# Altium PCB linkit-v4-0.1_6layers.PcbDoc (part 3 of 4)
Units mm, origin at the board's own origin, x right, y up, seen from the top; angles counter-clockwise.
Board outline 70 x 35 mm, 6 copper layers (Top Layer, Int1 (GND), Int2 (Sign), Int3 (Sign), Int4 (PWR), Bottom Layer), stack 1.551 mm thick; 190 components, 157 nets, 771 pads, 177 vias.
Unrouted connection lines stored in the file: 245.
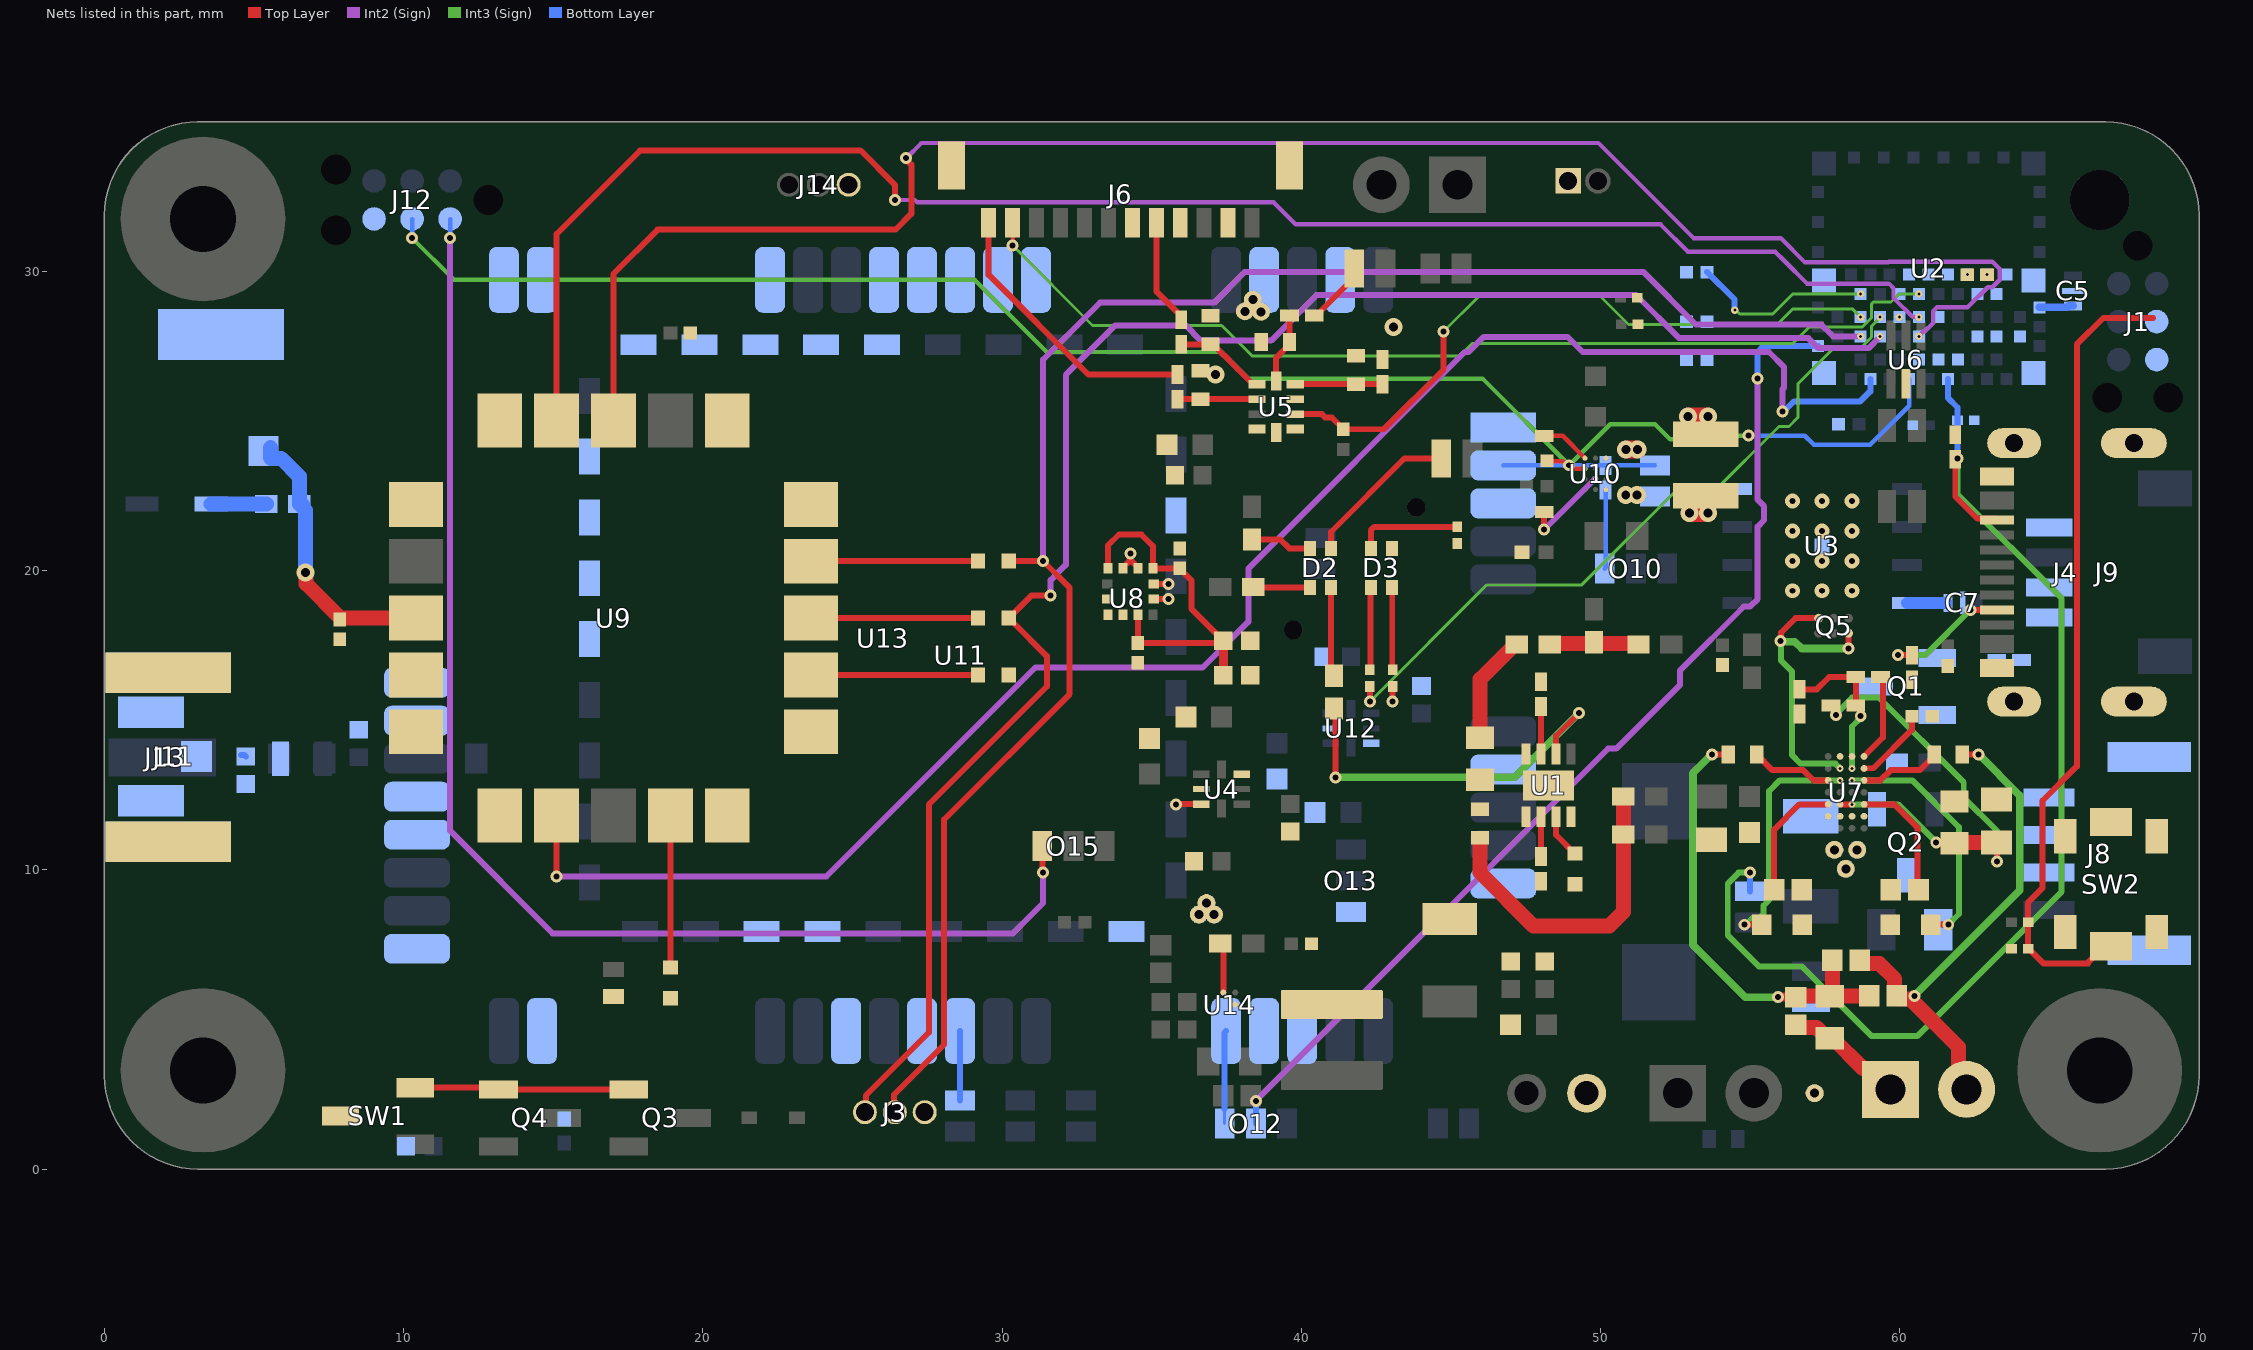
[diagram p6: the nets of this part, all layers, seen from the top]

## Part data (continued)
R46 R49: "Thick Film Resistors - SMD 0 Ohms 50mW 0201 1%", Manufacturer_Name=KEMET, Mouser Part Number=603-RC0201FR-070RL, Arrow Part Number=RC0201FR-070RL, Arrow Price/Stock=https://www.arrow.com/en/products/rc0201fr-070rl/yageo?region=nac, Datasheet Link=http://www.yageo.com/documents/recent/PYu-RC0201_51_RoHS_L_8.pdf, Height=0.26mm, Manufacturer_Part_Number=RC0201FR-070RL, Mouser Price/Stock=https://www.mouser.co.uk/ProductDetail/YAGEO/RC0201FR-070RL?qs=LWWr1WFOkdETHfAClQk8Xg%3D%3D
R47: "Thick Film Resistors - SMD 1/20W 2.74Kohms 1% 200ppm", Manufacturer_Name=Vishay, Datasheet Link=http://www.vishay.com/docs/20035/dcrcwe3.pdf, Height=0.28mm, Manufacturer_Part_Number=CRCW02012K74FNED
R48: "Thick Film Resistors - SMD 1/20watt 100Kohms 5% 200ppm", Manufacturer_Name=Vishay, Mouser Part Number=71-CRCW0201100KJNED, Arrow Part Number=CRCW0201100KJNED, Arrow Price/Stock=https://www.arrow.com/en/products/crcw0201100kjned/vishay, Datasheet Link=http://www.vishay.com/docs/20035/dcrcwe3.pdf, Height=0.28mm, Manufacturer_Part_Number=CRCW0201100KJNED, Mouser Price/Stock=https://www.mouser.co.uk/ProductDetail/Vishay-Dale/CRCW0201100KJNED?qs=IQLUlsvFoXu8A8gHIw6owA%3D%3D
R50: "Thick Film Resistors - SMD 1/16watt 49.9Kohms 1%", Manufacturer_Name=Vishay, Mouser Part Number=71-CRCW0402-49.9K-E3, Arrow Part Number=CRCW040249K9FKED, Arrow Price/Stock=https://www.arrow.com/en/products/crcw040249k9fked/vishay?region=nac, Datasheet Link=http://www.vishay.com/docs/20035/dcrcwe3.pdf, Height=0.4mm, Manufacturer_Part_Number=CRCW040249K9FKED, Mouser Price/Stock=https://www.mouser.co.uk/ProductDetail/Vishay-Dale/CRCW040249K9FKED?qs=hAuyw6LW%252BLhwjtjsHx%2FGDQ%3D%3D
R52 R53 R54 R55 R56: "Thick Film Resistors - SMD CRCW 402 jumper", Manufacturer_Name=Vishay, Mouser Part Number=71-CRCW04020000Z0EEH, Arrow Part Number=CRCW04020000Z0EEHP, Arrow Price/Stock=https://www.arrow.com/en/products/crcw04020000z0eehp/vishay?utm_currency=USD&region=nac, Datasheet Link=http://www.vishay.com/docs/20035/dcrcwe3.pdf, Height=0.4mm, Manufacturer_Part_Number=CRCW04020000Z0EEHP, Mouser Price/Stock=https://www.mouser.co.uk/ProductDetail/Vishay-Dale/CRCW04020000Z0EEHP?qs=Imq1NPwxi74NTc567q7flQ%3D%3D
SW1: "Board Mount Hall Effect/Magnetic Sensors Integrated Digital Omnipolar, TMR, High Sensitivity Magnetic Switch, SOT23 Package, Ind Temp, 2Hz", Manufacturer_Name="Allegro MicroSystems", Mouser Part Number=462-CT8132BV-IS3, Datasheet Link=https://www.mouser.fr/datasheet/2/1115/Allegro_DS_CT813x_Datasheet_GS_FINAL_R2_v2-3441103.pdf, Height=1.4mm, Manufacturer_Part_Number=CT8132BV-IS3, Mouser Price/Stock=https://www.mouser.fr/ProductDetail/Allegro-MicroSystems/CT8132BV-IS3?qs=GBLSl2Akirsc7cUAudCqXg%3D%3D
SW2: "SW SPST PB 50MA 12V SMT CK variant", Manufacturer=C&K, Manufacturers Part Number="PTS820J2xM SMTR LFS", Supplier Part Number 1=611-PTS820J25MSMTR, Distributor 1=EBV, Distributor 2="Future Electronics", Supplier 1=Mouser, Supplier 2=Digi-Key, Supplier Part Number 2=CKN10505CT-ND
U1: "Battery Management 800-mA linear batter y charger for one-ce", Manufacturer_Name="Texas Instruments", Mouser Part Number=595-BQ25176MDSGR, Arrow Part Number=BQ25176MDSGR, Arrow Price/Stock=https://www.arrow.com/en/products/bq25176mdsgr/texas-instruments?region=nac, Datasheet Link=https://www.ti.com/lit/gpn/bq25176m, Height=0.8mm, Manufacturer_Part_Number=BQ25176MDSGR, Mouser Price/Stock=https://www.mouser.co.uk/ProductDetail/Texas-Instruments/BQ25176MDSGR?qs=Y0Uzf4wQF3nVhcdITj52nA%3D%3D
U2: "IC ISP Smart Bluetooth Module", Manufacturer=InsightSIP, Manufacturers Part Number=ISP1807-LR-ST, Temp Max=85, Temp Min=-40, Supplier 1=Rutronik, Supplier 2=Mouser, Supplier Part Number 1=ISP1807-LR-ST, Supplier Part Number 2=359-ISP1807-LR-ST, Supplier Unit Price 1=8.5
U3: "IC MEM SERIAL NOR FLASH QSPI 128Mb/16MB 3.6V 166MHz WSON8 6X5", Manufacturer=ISSI, Supplier Part Number 1=2901145, Temp Max=105, Temp Min=-40, Distributor 1=EBV, Distributor 2="Future Electronics", Manufacturers Part Number=IS25LP128F-JKLE, Supplier 1=Farnell, Supplier 2=Mouser, Supplier Part Number 2=870-IS25LP128FJKLETR
U4 U12: "Power Switch ICs - Power Distribution Low Input VTG Dual L oad Switch", Manufacturer_Name="Texas Instruments", Mouser Part Number=595-TPS22960RSER, Arrow Part Number=TPS22960RSER, Arrow Price/Stock=https://www.arrow.com/en/products/tps22960rser/texas-instruments?region=nac, Datasheet Link=https://www.ti.com/lit/ds/symlink/tps22960.pdf?ts=1638681846865&ref_url=https%253A%252F%252Fwww.google.com%252F, Height=0.6mm, Manufacturer_Part_Number=TPS22960RSER, Mouser Price/Stock=https://www.mouser.co.uk/ProductDetail/Texas-Instruments/TPS22960RSER?qs=EQxOuqCyzqQpKHLEcq5RSg%3D%3D
U5: "Analog to Digital Converters - ADC 16B ADC w/ Int MUX P GA Comp Osc & Ref A", Manufacturer_Name="Texas Instruments", Mouser Part Number=595-ADS1115IRUGR, Arrow Part Number=ADS1115IRUGR, Arrow Price/Stock=https://www.arrow.com/en/products/ads1115irugr/texas-instruments?utm_currency=USD&region=nac, Datasheet Link=https://www.ti.com/lit/ds/symlink/ads1115.pdf?ts=1601235703022&ref_url=https%253A%252F%252Fwww.ti.com%252Fproduct%252FADS1115%253FkeyMatch%253DADS1115IRUGR%2526tisearch%253DSearch-EN-everything%2526usecase%253DOPN, Height=0.4mm, Manufacturer_Part_Number=ADS1115IRUGR, Mouser Price/Stock=https://www.mouser.co.uk/ProductDetail/Texas-Instruments/ADS1115IRUGR?qs=IK5e5L0zOXhqw%2F8AHSSbuA%3D%3D
U6: "ESD Suppressors / TVS Diodes High Speed Interface Protection Low Cap", Manufacturer_Name=STMicroelectronics, Datasheet Link=https://datasheet.lcsc.com/szlcsc/STMicroelectronics-USBLC6-2P6_C15999.pdf, Height=0.6mm, Manufacturer_Part_Number=USBLC62P6
U7: "Wireless Charging ICs Wireless Pwr Receivr A 595-BQ51003YFPR", Manufacturer_Name="Texas Instruments", Mouser Part Number=595-BQ51003YFPT, Arrow Part Number=BQ51003YFPT, Arrow Price/Stock=https://www.arrow.com/en/products/bq51003yfpt/texas-instruments?region=nac, Datasheet Link=http://www.ti.com/lit/gpn/BQ51003, Height=0.5mm, Manufacturer_Part_Number=BQ51003YFPT, Mouser Price/Stock=https://www.mouser.co.uk/ProductDetail/Texas-Instruments/BQ51003YFPT?qs=QCUnHQQYO1rX6GZ4rUhwCg%3D%3D
U8: "IC AXL Accel/temp SPI/I2C 12LGA", Manufacturer="Bosch Sensortec", Supplier Part Number 1=828-1081-1-ND, Temp Max=85, Temp Min=-40, Manufacturers Part Number=BMA400, Supplier 1=Digi-Key, Supplier 2=Mouser, Supplier Part Number 2=262-BMA400
U9: "GNSS / GPS Modules u-blox M10 GNSS antenna module ROM, TCXO, SAW, LNA LGA, 16x16 mm", Manufacturer_Name=U-Blox, Mouser Part Number=377-SAM-M10Q-00B, Datasheet Link=https://content.u-blox.com/sites/default/files/documents/SAM-M10Q_DataSheet_UBX-22013293.pdf, Height=6.8mm, Manufacturer_Part_Number=SAM-M10Q-00B, Mouser Price/Stock=https://www.mouser.co.uk/ProductDetail/u-blox/SAM-M10Q-00B?qs=vvQtp7zwQdOaA6LplTUKjg%3D%3D
U10: "Switching Voltage Regulators 5.5-V buck-boost con verter with 75-nA op", Manufacturer_Name="Texas Instruments", Mouser Part Number=595-TPS63901YCJR, Arrow Part Number=TPS63901YCJR, Arrow Price/Stock=https://www.arrow.com/en/products/tps63901ycjr/texas-instruments?region=nac, Datasheet Link=https://www.ti.com/lit/ds/symlink/tps63901.pdf?ts=1658737279065&ref_url=https%253A%252F%252Fwww.ti.com%252Fproduct%252FTPS63901%253FkeyMatch%253DTPS63901YCJR%2526tisearch%253Dsearch-everything%2526usecase%253DOPN, Height=0.35mm, Manufacturer_Part_Number=TPS63901YCJR, Mouser Price/Stock=https://www.mouser.co.uk/ProductDetail/Texas-Instruments/TPS63901YCJR?qs=vvQtp7zwQdNZy3FE2e2hqg%3D%3D
U11: "KIM2 Module 48 pins 1.27mm pitch 36.6 x 25.4 x 5mm", Manufacturer=Kineis, Rating=3.3-5V, Tolerance="-30 /  +55°C", BOI="SMD48 36.6x25.4x5mm", DESIG="KIMFLEX Module 48 pins 1.27mm pitch 36.6 x 25.4 x 5mm", K P/N=-, Manufacturer P/N=KIM2, Supplier=Kineis, Supplier P/N=KIMFLEX, VAL=KIM2
U13: "Arribada SMD module Argos comunication with PA GR5504"
U14: "Switching Voltage Regulators 95-nA low IQ 5.5-V b oost converter with INLIMIT (1.9A)", Manufacturer_Name="Texas Instruments", Mouser Part Number=595-TPS612997YBHR, Arrow Part Number=TPS612997YBHR, Arrow Price/Stock=https://www.arrow.com/en/products/tps612997ybhr/texas-instruments?utm_currency=USD&region=nac, Datasheet Link=https://www.ti.com/lit/gpn/tps61299, Height=0.4mm, Manufacturer_Part_Number=TPS612997YBHR, Mouser Price/Stock=https://www.mouser.co.uk/ProductDetail/Texas-Instruments/TPS612997YBHR?qs=mELouGlnn3dLhnQxUdz5hw%3D%3D

## Via types
v1: diameter 0.6, hole 0.3, Top Layer to Int4 (PWR), 41 vias
v2: diameter 0.4, hole 0.2, Top Layer to Int3 (Sign), 33 vias
v3: diameter 0.4, hole 0.2, Int3 (Sign) to Bottom Layer, 15 vias
v4: diameter 0.4, hole 0.2, Int2 (Sign) to Bottom Layer, 14 vias
v5: diameter 0.25, hole 0.1, Int3 (Sign) to Bottom Layer, 12 vias
v6: diameter 0.25, hole 0.1, Int2 (Sign) to Bottom Layer, 12 vias
v7: diameter 0.5, hole 0.2, Top Layer to Bottom Layer, 12 vias
v8: diameter 0.6, hole 0.3, Int4 (PWR) to Bottom Layer, 10 vias
v9: diameter 0.4, hole 0.2, Top Layer to Int2 (Sign), 8 vias
v10: diameter 0.226, hole 0.1, Top Layer to Int3 (Sign), 5 vias
v11: diameter 0.2, hole 0.1, Top Layer to Bottom Layer, 4 vias
v12: diameter 0.6, hole 0.3, Top Layer to Bottom Layer, 4 vias
v13: diameter 0.4, hole 0.2, Top Layer to Bottom Layer, 2 vias
v14: diameter 0.4, hole 0.2, Int2 (Sign) to Int3 (Sign), 2 vias
v15: diameter 0.6, hole 0.3, Top Layer to Int3 (Sign), 2 vias
v16: diameter 0.169, hole 0.1, Top Layer to Int2 (Sign), 1 vias

## Nets (pads, with @x,y where several pads share a name; then routed paths per layer and width w, separated by ;. In a path a pad name is that pad's centre, name@x,y a point inside that pad or via, vN(x,y) a via of type N, cw(c..) or ccw(c..) an arc to the next point about the centre after c; other vN are vias at no path point)
ADC0: O7.2 R27.1
ADC1: O8.2 R30.1 | length 2.2
  Top Layer w0.2: R30.1@40.428,28.522 40.541,28.522 40.641,28.622 40.641,28.664 41.77,29.794 O8.2@41.77,30.099
ADC2: J6.5 R32.1 | length 3.6
  Top Layer w0.2: J6.5@35.154,31.623 35.154,29.332 35.987,28.499 R32.1@35.987,28.387
ADC3: J6.12 R51.1 | length 9.4
  Top Layer w0.2: J6.12@29.554,31.623 29.554,29.882 32.884,26.552 R51.1@35.864,26.552
ADC_ALERT_RDY: R28.2 U2.64 U5.2 | length 22.4
  Top Layer w0.2: U5.2@39.797,25.228 40.685,25.228 40.798,25.115 41.021,25.115 41.402,24.734 R28.2@41.402,24.724 42.758,24.724 44.751,26.717 v2(44.751,27.987)
  Int3 (Sign) w0.1: v2(44.751,27.987) 45.924,29.16 49.995,29.16 50.934,28.221 55.9,28.221 56.134,28.455 56.427,28.749 58.41,28.749 v5(58.685,28.474)
AGND: C14.2 C15.2 C16.2 C57.2 V?1.1 V?2.1 V?3.1 | length 0.6
  Top Layer w0.2: C57.2@36.626,26.678 36.687,26.617 37.071,26.617 v15(37.132,26.556)
  other v15: 43.076,28.133
BAT_AN: C4.2 O5.1 U2.38 | length 36.5
  Int3 (Sign) w0.2: v3(54.991,9.906) 54.61,9.906 54.248,9.544 54.248,7.816 55.288,6.776 56.724,6.776 59.055,4.445 60.579,4.445 65.405,9.271 65.405,19.071 61.924,22.552 v3(61.924,23.749)
  Bottom Layer w0.2: O5.1@54.991,9.284 v3(54.991,9.906) ; U2.38@61.61,26.399 61.61,25.766 61.924,25.452 C4.2@61.924,25.019 v3(61.924,23.749)
BAT_READ_EN: R3.2 R22.2 U2.9 | length 6.2
  Int3 (Sign) w0.1: v6(54.483,28.702) 54.524,28.702 54.651,28.575 55.753,28.575 56.427,29.249 v5(58.685,29.249)
  Bottom Layer w0.2: R22.2@53.553,29.972 53.563,29.972 54.473,29.062 54.473,28.712 v6(54.483,28.702)
BMA_PWR: C37.2 C38.2 R29.1 R31.2 U8.3 U8.7 U8.10 | length 12.2
  Top Layer w0.2: U8.10@33.54,20.079 33.54,20.843 33.906,21.209 34.654,21.209 35.04,20.823 U8.7@35.04,20.079 C37.2@35.941,20.079 35.941,20.059 36.322,19.678 36.322,18.727 R29.1@37.396,17.653 37.325,17.582 C38.2@34.537,17.582 34.54,17.586 U8.3@34.54,18.529
  Top Layer w0.3: R31.2@37.396,16.51 R29.1@37.396,17.653
BOOT1: C29.2 U7.C4 | length 4.2
  Top Layer w0.2: C29.2@55.798,9.328 55.798,11.348 56.642,12.192 U7.C4@57.601,12.192
BOOT2: C34.2 U7.C1 | length 4.2
  Top Layer w0.2: U7.C1@58.801,12.192 59.817,12.192 60.582,11.427 C34.2@60.582,9.328
CLAMP1: C23.2 U7.E3 | length 8.1
  Top Layer w0.2: v2(54.802,8.168) C23.2@55.388,8.168
  Int3 (Sign) w0.2: v2(54.802,8.168) 54.856,8.168 55.105,8.417 55.328,8.417 55.445,8.534 55.445,8.811 55.626,8.992 55.626,12.63 55.988,12.992 v10(58.001,12.992)
CLAMP2: C36.2 U7.E2 | length 8.2
  Top Layer w0.2: C36.2@61.029,8.168 v2(61.616,8.168)
  Int3 (Sign) w0.2: v10(58.401,12.992) 60.414,12.992 61.976,11.43 61.976,8.529 v2(61.616,8.168)
COIL-1: C24.1 C28.1 J7.1 | length 4.1
  Top Layer w0.5: C24.1@56.515,4.826 56.61,4.731 57.212,4.731 57.563,4.38 C28.1@57.658,4.38 57.753,4.38 58.766,3.367 58.99,3.367 J7.1@59.69,2.667
COIL-2: C32.1 C33.1 C34.1 C35.1 C36.1 J7.2 U7.B1 U7.B2 | length 17
  Top Layer w0.2: C35.1@62.09,13.862 v2(62.631,13.862)
  Top Layer w0.5: C32.1@58.661,6.987 58.661,6.972 58.756,6.877 59.312,6.877 59.825,6.364 59.825,5.866 C33.1@59.896,5.795 59.896,5.78 59.991,5.685 60.355,5.685 61.962,4.078 61.962,2.935 J7.2@62.23,2.667
  Int3 (Sign) w0.254: v2(60.482,5.795) 64.008,9.321 64.008,12.485 v2(62.631,13.862)
COMM1: C25.2 U7.E4 | length 2.7
  Top Layer w0.2: C25.2@55.212,13.862 55.739,13.335 56.769,13.335 57.112,12.992 U7.E4@57.601,12.992
COMM2: C35.2 U7.E1 | length 2.7
  Top Layer w0.2: U7.E1@58.801,12.992 59.347,12.992 59.69,13.335 60.663,13.335 C35.2@61.19,13.862
DCDC_3V3: D3.1 R29.2
GND: BT1.- C1.2 C2.1 C3.1 C4.1 C5.3 C6.1 C7.3 C8.2 C9.1 C10.2 C11.1 C12.1 C13.2 C17.1 C18.1 C19.1 C20.2 C21.2 C22.2 C26.2 C27.2 C30.2 C31.2 C37.1 C38.1 C39.2 C40.1 C43.1 C44.2 C45.2 C46.1 C47.1 C49.1 C58.2 J1.5 J2.1 J3.1 J4.A1_B12 J4.B1_A12 J4.SHIELD J5.2 J6.2 J6.4 J6.6 J6.13 J6.14 J8.4 J8.MP1 J8.MP2 J9.1 J11.1 J11.2 J12.5 J13.2 J14.1 O11.1 Q1.2 R6.2 R7.1 R8.1 R10.1 R11.1 R12.1 R18.1 R19.1 R20.1 R21.1 R22.1 R26.1 R33.1 R34.1 R37.2 R39.2 SW1.3 SW2.1 SW2.G1 SW2.G2 SW2.G3 SW2.G4 U1.4 U1.9 U2.1 U2.7 U2.14 U2.16 U2.18 U2.21 U2.23 U2.24 U2.25 U2.31 U3.4 U3.9 U4.3 U4.6 U5.1 U5.3 U6.2 U7.G2 U7.G3 U8.1 U8.8 U8.9 U9.1 U9.4 U9.5 U9.6 U9.10 U9.11 U9.15 U9.16 U9.20 U11.1@46.749,24.786 U11.3@46.749,22.246 U11.7@46.749,13.356 U11.10@46.749,9.546 U11.13@40.029,4.616 U11.14@38.759,4.616 U11.21@24.789,4.616 U11.24@14.629,4.616 U11.26@10.449,7.366 U11.29@10.449,11.176 U11.30@10.449,12.446 U11.32@10.449,14.986 U11.33@10.449,16.256 U11.34@13.359,29.716 U11.35@14.629,29.716 U11.36@22.249,29.716 U11.39@26.059,29.716 U11.42@29.869,29.716 U11.43@31.139,29.716 U11.45@38.759,29.716 U11.47@41.299,29.716 U12.3 U12.6 U13.6 U13.13 U13.14 U13.15 U13.16 U13.17 U13.19 U13.20 U13.21 U13.29 V4.2 V5.2 V6.2 V7.2 V8.2 V9.2 V10.2 V?1.2 V?2.2 V?3.2 | length 0.9
  Top Layer w0.2: U8.9@34.04,20.079 34.04,20.104 34.252,20.316 34.252,20.536 v2(34.29,20.574) ; 34.328,20.316 34.54,20.104 U8.8@34.54,20.079
  other v7: 56.404,19.328 57.404,19.328 58.404,19.328 56.404,20.328 57.404,20.328 58.404,20.328 56.404,21.328 57.404,21.328 58.404,21.328 56.404,22.328 57.404,22.328 58.404,22.328
GPIO: J6.11 U2.15 | length 33.7
  Top Layer w0.146: v2(30.353,30.861) J6.11@30.354,31.623 J6.11@30.354,31.623
  Int3 (Sign) w0.1: v2(30.353,30.861) 33.02,28.194 37.338,28.194 38.354,27.178 45.29,27.178 45.702,27.59 48.056,27.59 56.419,27.59 56.977,28.148 58.749,28.148 59.055,28.455 59.055,28.915 59.114,28.974 59.699,28.974 59.975,29.249 v5(60.635,29.249)
GPS_INT: U2.61 U9.19 | length 55.7
  Top Layer w0.2: U9.19@15.118,25.015 15.118,31.247 17.907,34.036 25.273,34.036 26.416,32.893 v9(26.416,32.385)
  Int2 (Sign) w0.146: v9(26.416,32.385) 27.088,32.385 27.169,32.304 39.077,32.304 39.812,31.569 52.004,31.569 52.916,30.658 55.829,30.658 56.134,30.353 56.896,29.591 59.632,29.591 59.787,29.436 59.787,29.113 60.426,28.474 v6(60.635,28.474)
GPS_NRST: U2.53 U9.18 | length 60.2
  Top Layer w0.2: U9.18@17.018,25.015 17.018,29.918 18.492,31.392 26.439,31.392 26.97,31.923 26.97,33.565 26.797,33.738 v9(26.797,33.782)
  Int2 (Sign) w0.146: v9(26.797,33.782) 27.305,34.29 49.925,34.29 53.104,31.112 56.018,31.112 56.83,30.299 59.604,30.299 59.631,30.326 63.087,30.326 63.337,30.076 63.337,29.722 63.087,29.472 62.934,29.472 62.259,28.797 61.239,28.797 61.114,28.672 61.114,28.275 60.833,27.995 60.777,27.995 60.66,27.878 60.66,27.862 60.635,27.837 v6(60.635,27.824)
GPS_PPS: U2.46 U9.7 | length 57.1
  Top Layer w0.2: v9(15.118,9.779) U9.7@15.118,11.815
  Int2 (Sign) w0.2: v9(15.118,9.779) 24.13,9.779 31.115,16.764 36.703,16.764 38.227,18.288 38.227,20.066 45.466,27.305 45.593,27.305 46.101,27.813 48.895,27.813 49.403,27.305 55.626,27.305 56.134,26.797 56.134,26.111 56.085,26.062 v4(56.085,25.322)
  Bottom Layer w0.2: v4(56.085,25.322) 56.128,25.322 56.46,25.654 58.674,25.654 59.01,25.99 U2.46@59.01,26.399
GPS_PWR_EN: R21.2 U2.50 U4.7 | length 0.9
  Top Layer w0.2: v2(35.814,12.192) 35.818,12.196 36.659,12.196 U4.7@36.663,12.2
GPS_UART_RX: J3.2 R40.2 U2.56 | length 58.5
  Top Layer w0.2: J3.2@26.416,1.905 26.39,1.931 26.39,2.488 28.067,4.165 28.067,11.684 32.258,15.875 32.258,19.431 v9(31.369,20.32) R40.2@30.226,20.32
  Int2 (Sign) w0.2: v9(31.369,20.32) 31.369,27.051 33.274,28.956 37.084,28.956 38.1,29.972 51.435,29.972 53.184,28.223 56.134,28.223 57.375,28.223 57.774,27.824 v6(58.685,27.824)
GPS_UART_TX: J3.3 R42.2 U2.55 | length 58.3
  Top Layer w0.2: J3.3@25.416,1.905 25.449,1.938 25.449,2.462 27.559,4.572 27.559,12.192 31.496,16.129 31.496,17.145 30.376,18.265 30.364,18.265 30.335,18.294 R42.2@30.335,18.306 ; R42.2@30.226,18.415 30.988,19.177 v9(31.623,19.177)
  Int2 (Sign) w0.2: v9(31.623,19.177) 31.623,19.685 32.131,20.193 32.131,26.543 33.782,28.194 36.131,28.194 36.639,27.686 38.989,27.686 40.513,29.21 51.181,29.21 52.622,27.769 56.134,27.769 56.94,27.769 57.277,27.432 58.953,27.432 59.335,27.814 v6(59.335,27.824)
I2C_SCL: J8.2 J9.4 R1.1 R43.2 U2.37 U5.10 U8.12
I2C_SDA: J8.3 J9.3 R2.1 R44.1 U2.39 U5.9 U8.2
IMU_PWR: R18.2 R31.1 U2.41
INT1_IMU: U2.49 U8.5 | length 0.5
  Top Layer w0.2: U8.5@35.065,19.054 v2(35.56,19.054)
INT2_IMU: U2.29 U8.6 | length 0.5
  Top Layer w0.2: U8.6@35.065,19.554 v2(35.56,19.554)
KIM_I2C_SCL: U11.41@28.599,29.716
KIM_I2C_SDA: U11.40@27.329,29.716
KIM_PWR_ON: O12.2 U2.2 | length 35.3
  Int2 (Sign) w0.2: v4(38.481,2.286) 50.246,14.051 50.521,14.051 52.656,16.185 52.656,16.669 54.79,18.803 54.998,18.803 55.245,19.05 55.245,21.472 55.464,21.691 55.464,22.15 55.245,22.369 v4(55.245,26.416)
  Bottom Layer w0.2: O12.2@38.481,1.524 v4(38.481,2.286) ; v4(55.245,26.416) 55.245,27.305 55.439,27.499 U2.2@57.26,27.499
KIM_RX: U11.19@27.329,4.616
KIM_TX: O3.1 U11.18@28.599,4.616 U13.22 | length 2.3
  Bottom Layer w0.2: O3.1@28.599,2.299 U11.18@28.599,4.616
LED_B: R24.1 U2.63 | length 23.8
  Top Layer w0.2: v2(42.291,15.621) R24.1@42.291,16.129
  Int3 (Sign) w0.1: v2(42.291,15.621) 46.197,19.527 49.372,19.527 52.451,22.606 53.75,22.606 55.963,24.818 56.294,24.818 56.589,25.113 56.589,26.236 57.785,27.432 58.682,27.432 59.053,27.802 59.053,28.17 59.335,28.452 v5(59.335,28.474)
LED_G: R25.1 U2.60 | length 0.5
  Top Layer w0.2: v2(43.053,15.621) R25.1@43.053,16.129
LED_R: R23.1 U2.62
  other v5: 59.985,28.474
LX1: L2.1 U10.A1 | length 0.6
  Top Layer w0.6: v1(52.965,21.922) v1(53.594,21.922)
  other v1: 50.84,22.52 51.221,22.52
LX2: L2.2 U10.D1 | length 1.1
  Top Layer w0.6: v1(50.844,24.042) v1(51.225,24.042) ; v1(52.92,25.146) v1(53.594,25.146)
NetBT1_+: BT1.+ C40.2 R41.1 U9.3 | length 9.3
  Top Layer w0.5: v12(6.731,19.939) 6.75,19.92 6.75,19.558 C40.2@7.874,18.434 ; C40.2@7.925,18.415 U9.3@10.418,18.415
  Bottom Layer w0.5: BT1.+@5.555,24.112 5.555,23.772 5.574,23.753 5.914,23.753 6.519,23.147 R41.1@6.519,22.225 ; R41.1@6.594,22.225 6.644,22.175 6.644,22.1 6.731,22.013 v12(6.731,19.939)
NetC2_2: C2.2 R53.1 U1.8 | length 3.7
  Top Layer w0.2: R53.1@47.127,17.526 R53.1@47.202,17.526
  Top Layer w0.5: C2.2@45.974,14.416 45.974,16.373 R53.1@47.127,17.526
NetC5_2: C5.2 U2.26 | length 12.5
  Top Layer w0.2: v2(53.721,13.862) 54.262,13.862
  Top Layer w0.3: v2(55.929,5.746) 56.515,5.746
  Int3 (Sign) w0.254: v2(53.721,13.862) 53.086,13.227 53.086,7.493 54.833,5.746 v2(55.929,5.746)
  Bottom Layer w0.254: U2.26@64.66,28.799 65.59,28.799 65.636,28.845 C5.2@65.786,28.845
NetC7_2: C7.2 U3.8 | length 1.4
  Bottom Layer w0.302: C7.2@61.554,18.923 C7.2@61.603,18.923
  Bottom Layer w0.4: U3.8@60.244,18.923 60.544,18.923 C7.2@61.554,18.923
NetC14_1: C14.1 R27.2 U5.4 | length 2.9
  Top Layer w0.2: U5.4@39.797,26.228 R27.2@42.718,26.228
NetC15_1: C15.1 R30.2 U5.5 | length 2.5
  Top Layer w0.2: U5.5@39.159,26.338 39.159,27.113 39.604,27.558 C15.1@39.604,27.633 39.604,28.422 39.539,28.422 R30.2@39.639,28.522
NetC16_1: C16.1 R32.2 U5.6 | length 3.1
  Top Layer w0.2: R32.2@35.987,27.563 37.042,27.563 37.395,27.21 37.403,27.21 37.868,26.744 38.334,26.278 38.471,26.278 U5.6@38.521,26.228
NetC23_1: C23.1 C24.2 C25.1 C28.2 C29.1 C32.2 C33.2 U7.B3 U7.B4 | length 3.6
  Top Layer w0.2: C24.2@56.515,5.746 C24.2@56.549,5.78 ; C33.2@58.911,5.78 C33.2@58.976,5.715
  Top Layer w0.5: C24.2@56.549,5.78 C28.2@57.658,5.78 C33.2@58.911,5.78 ; C28.2@57.741,5.863 C32.2@57.741,6.987
NetC30_1: C30.1 C31.1 R36.1 U7.C2 U7.C3 | length 15.7
  Top Layer w0.2: R36.1@57.697,15.494 57.768,15.494 57.868,15.394 v2(57.868,15.173) ; U7.C3@58.001,12.192 v10(58.401,12.192) ; v2(61.214,10.922) 61.794,10.922 C31.1@61.83,10.886 C31.1@61.86,10.916 ; v2(63.246,10.287) C30.1@63.246,10.897
  Top Layer w0.5: C31.1@61.86,10.916 C30.1@63.227,10.916 C30.1@63.246,10.897
  Int3 (Sign) w0.2: v2(57.868,15.173) 57.868,15.22 58.402,15.754 59.303,15.754 62.133,12.924 62.133,12.416 63.246,11.303 v2(63.246,10.287) ; v10(58.401,12.192) 59.944,12.192 v2(61.214,10.922)
NetC49_2: C49.2 J11.3 L3.1@5.889,13.716 | length 0.2
  Bottom Layer w0.2: C49.2@4.572,13.843 4.682,13.843 C49.2@4.735,13.79
NetC57_1: C57.1 R51.2 U5.7 | length 2.8
  Top Layer w0.2: R51.2@35.864,25.728 C57.1@36.626,25.728 U5.7@38.521,25.728 U5.7@38.519,25.73 ; C57.1@36.626,25.827 C57.1@36.723,25.73
NetC58_1: C58.1 R54.2 R56.2 U1.1 | length 10.7
  Top Layer w0.5: C58.1@45.974,10.993 45.974,9.906 47.752,8.128 50.292,8.128 50.758,8.594 R54.2@50.758,11.176 R56.2@50.758,12.446
NetD2_1: D2.1 O9.2 | length 5.3
  Top Layer w0.2: D2.1@40.99,20.742 40.99,21.292 43.447,23.749 O9.2@44.679,23.749
NetD2_2: D2.2 R13.1 | length 2.1
  Top Layer w0.2: R13.1@38.354,21.04 39.298,21.04 39.596,20.742 D2.2@40.29,20.742
NetD2_3: D2.3 R14.2 | length 1.9
  Top Layer w0.2: R14.2@38.396,19.457 38.411,19.442 D2.3@40.29,19.442
NetD2_4: D2.4 R15.1 | length 3
  Top Layer w0.2: D2.4@40.99,19.442 40.99,16.652 R15.1@41.148,16.494
NetD3_2: D3.2 R23.2 | length 3.5
  Top Layer w0.2: D3.2@42.322,20.742 42.322,21.346 42.439,21.463 R23.2@45.212,21.463
NetD3_3: D3.3 R24.2 | length 2.8
  Top Layer w0.2: R24.2@42.291,16.689 42.306,16.705 42.306,19.427 D3.3@42.322,19.442
NetD3_4: D3.4 R25.2 | length 2.8
  Top Layer w0.2: D3.4@43.022,19.442 43.038,19.427 43.038,16.705 R25.2@43.053,16.689
NetD4_1: D4.1 R41.2 | length 1.9
  Bottom Layer w0.5: D4.1@3.563,22.225 R41.2@5.419,22.225
NetJ4_A5: J4.A5 R34.2 | length 4.4
  Top Layer w0.2: v2(59.944,17.176) R34.2@60.401,17.176 ; v2(62.357,18.691) J4.A5@63.243,18.691
  Int3 (Sign) w0.2: v2(59.944,17.176) 60.842,17.176 v2(62.357,18.691)
NetJ4_B5: J4.B5 R33.2 | length 3
  Top Layer w0.2: R33.2@61.849,23.718 61.849,22.479 62.587,21.741 63.193,21.741 J4.B5@63.243,21.691
NetJ12_1: J12.1 O15.1 | length 44
  Top Layer w0.1: O15.1@31.344,10.308 O15.1@31.344,10.795
  Top Layer w0.2: O15.1@31.344,10.308 31.344,9.931 v9(31.369,9.906)
  Int2 (Sign) w0.2: v4(11.557,31.115) 11.557,11.303 14.986,7.874 30.353,7.874 31.369,8.89 v9(31.369,9.906)
  Bottom Layer w0.146: v4(11.557,31.115) J12.1@11.557,31.75
NetL5_2: L5.2 U14.B1
NetO10_1: O10.1 R48.2 | length 2.6
  Bottom Layer w0.146: O10.1@50.14,20.066 50.165,20.091 R48.2@50.165,22.692
NetO12_1: O12.1 U11.15@37.489,4.616 | length 3.1
  Bottom Layer w0.1: O12.1@37.44,1.524 O12.1@37.44,2.011
  Bottom Layer w0.2: O12.1@37.44,2.011 37.44,4.567 U11.15@37.489,4.616
NetO13_1: O13.1 U13.30
NetQ1_1: Q1.1 R3.1
NetQ1_3: Q1.3 Q2.1 R4.2
NetQ2_3: Q2.3 R5.1
NetQ3_1: Q3.1 Q4.1 SW1.2 | length 7.2
  Top Layer w0.2: SW1.2@10.414,2.794 10.394,2.774 SW1.2@10.394,2.728 13.109,2.728 Q4.1@13.174,2.663 Q3.1@17.526,2.663
NetQ5_A2: Q5.A2 Q5.C1 U7.F3 | length 10.4
  Top Layer w0.2: v2(56.007,17.653) 56.034,17.68 56.034,17.934 56.328,18.228 56.511,18.411 Q5.C1@57.285,18.411 ; v2(58.285,17.399) Q5.A2@58.285,17.911
  Int3 (Sign) w0.2: v2@56.021,17.639 56.021,17.004 56.388,16.637 56.388,13.843 56.678,13.553 57.84,13.553 v10(58.001,13.392)
  Int3 (Sign) w0.254: v2(56.007,17.653) 56.021,17.639 56.035,17.625 56.489,17.625 56.715,17.399 v2(58.285,17.399)
NetR10_2: R10.2 U1.3 | length 1.5
  Top Layer w0.2: U1.3@48.51,11.777 48.51,11.172 49.137,10.546 R10.2@49.149,10.546
NetR11_2: R11.2 U1.2 | length 1.3
  Top Layer w0.2: R11.2@48.01,10.445 U1.2@48.01,11.777
NetR12_2: R12.2 U1.7 | length 1.6
  Top Layer w0.2: R12.2@48.006,15.463 48.008,15.461 48.008,13.879 U1.7@48.01,13.877
NetR17_1: R17.1 U2.20
  other v11: 62.26,29.899
NetR17_2: R17.2 U2.22
  other v11: 62.91,29.899
NetR36_2: R36.2 R38.1 R39.1 U7.F2 | length 5.3
  Top Layer w0.2: R39.1@56.642,16.033 57.223,16.033 57.63,16.44 R38.1@58.525,16.44 58.525,15.498 R36.2@58.521,15.494 58.591,15.494 58.691,15.394 v2(58.691,15.136)
  Int3 (Sign) w0.2: v10(58.401,13.392) 58.401,14.792 58.691,15.082 v2(58.691,15.136)
NetR37_1: R37.1 U7.F1 | length 2.6
  Top Layer w0.2: U7.F1@58.801,13.392 58.806,13.397 59.117,13.397 60.401,14.681 R37.1@60.401,15.132
NetR38_2: R38.2 U7.G1 | length 2.9
  Top Layer w0.2: U7.G1@58.801,13.792 59.436,14.427 59.436,16.353 R38.2@59.349,16.44
NetR40_1: R40.1 U9.14 | length 5.6
  Top Layer w0.2: U9.14@23.618,20.315 23.623,20.32 R40.1@29.201,20.32
NetR42_1: R42.1 U9.13 | length 5.6
  Top Layer w0.2: U9.13@23.618,18.415 R42.1@29.201,18.415
NetR43_1: R43.1 U9.12 | length 5.6
  Top Layer w0.2: U9.12@23.618,16.515 R43.1@29.201,16.515
NetR44_2: R44.2 U9.9 | length 5.1
  Top Layer w0.2: R44.2@18.918,6.736 U9.9@18.918,11.815
NetR45_1: R45.1 U10.B2 | length 3
  Top Layer w0.2: v9(48.112,21.375) R45.1@48.112,21.962
  Int2 (Sign) w0.2: v9(48.112,21.375) 49.794,23.057 v16(49.828,23.057)
NetR46_1: R46.1 U10.C3 | length 3
  Top Layer w0.15: 48.112,24.502 48.733,24.502 49.478,23.757 ; R46.1@48.205,23.665 48.209,23.661 48.729,23.661 48.986,23.404 U10.C3@49.471,23.404
NetR47_2: R47.2 U10.D3
NetR50_1: R50.1 U14.C2 | length 1.7
  Top Layer w0.2: R50.1@37.296,7.535 37.392,7.439 U14.C2@37.392,5.903
NetR52_1: R52.1 R53.2 R55.1 | length 3
  Top Layer w0.254: R53.2@48.302,17.526 R53.2@48.344,17.569 ; R55.1@49.741,17.569 R55.1@49.784,17.611 R55.1@49.827,17.569 ; R52.1@51.224,17.569 R52.1@51.266,17.526
  Top Layer w0.5: R53.2@48.344,17.569 R55.1@49.741,17.569 ; R55.1@49.827,17.569 R52.1@51.224,17.569
NPG_LED: R15.2 U1.6 | length 13
  Top Layer w0.2: R15.2@41.09,15.394 41.137,15.347 v2(41.137,13.092) ; U1.6@48.51,13.877 48.51,14.474 v2(49.276,15.24)
  Int3 (Sign) w0.254: v2@41.159,13.092 47.128,13.092 v2(49.276,15.24)
nRESET: C6.2 J1.3 R16.1 SW2.2 U2.13 | length 27
  Top Layer w0.2: SW2.2@67.056,7.45 66.831,7.45 66.293,6.912 66.293,6.88 64.794,6.88 64.308,7.366 C6.2@64.288,7.366 R16.1@64.288,8.255 64.288,8.916 64.77,9.398 64.77,12.319 65.913,13.462 65.913,27.559 66.802,28.448 68.453,28.448
nRESET-SAT: J12.3 O11.2 R48.1 U2.42 U11.2@46.749,23.516 U13.35 | length 61.3
  Int3 (Sign) w0.146: v3(10.287,31.115) 11.684,29.718 29.083,29.718 31.496,27.305 37.338,27.305 38.227,26.416 46.055,26.416 v3(48.95,23.521) 50.321,24.892 51.816,24.892 52.324,24.384 53.536,24.384 53.661,24.51 v3(54.941,24.51)
  Bottom Layer w0.146: v3(10.287,31.115) J12.3@10.287,31.75 ; U11.2@46.749,23.516 50.155,23.516 50.165,23.526 50.175,23.516 O11.2@51.816,23.516 ; v3(54.941,24.51) 56.824,24.51 57.123,24.211 58.583,24.211 58.937,24.211 59.009,24.211 60.31,25.512 U2.42@60.31,26.399